# Altium PCB PCB.PcbDoc
Units mm, origin at the board's own origin, x right, y up, seen from the top; angles counter-clockwise.
Board outline 26.7 x 28 mm, 2 copper layers (Top Layer, Bottom Layer), stack 1.572 mm thick; 11 components, 7 nets, 46 pads, 59 vias.
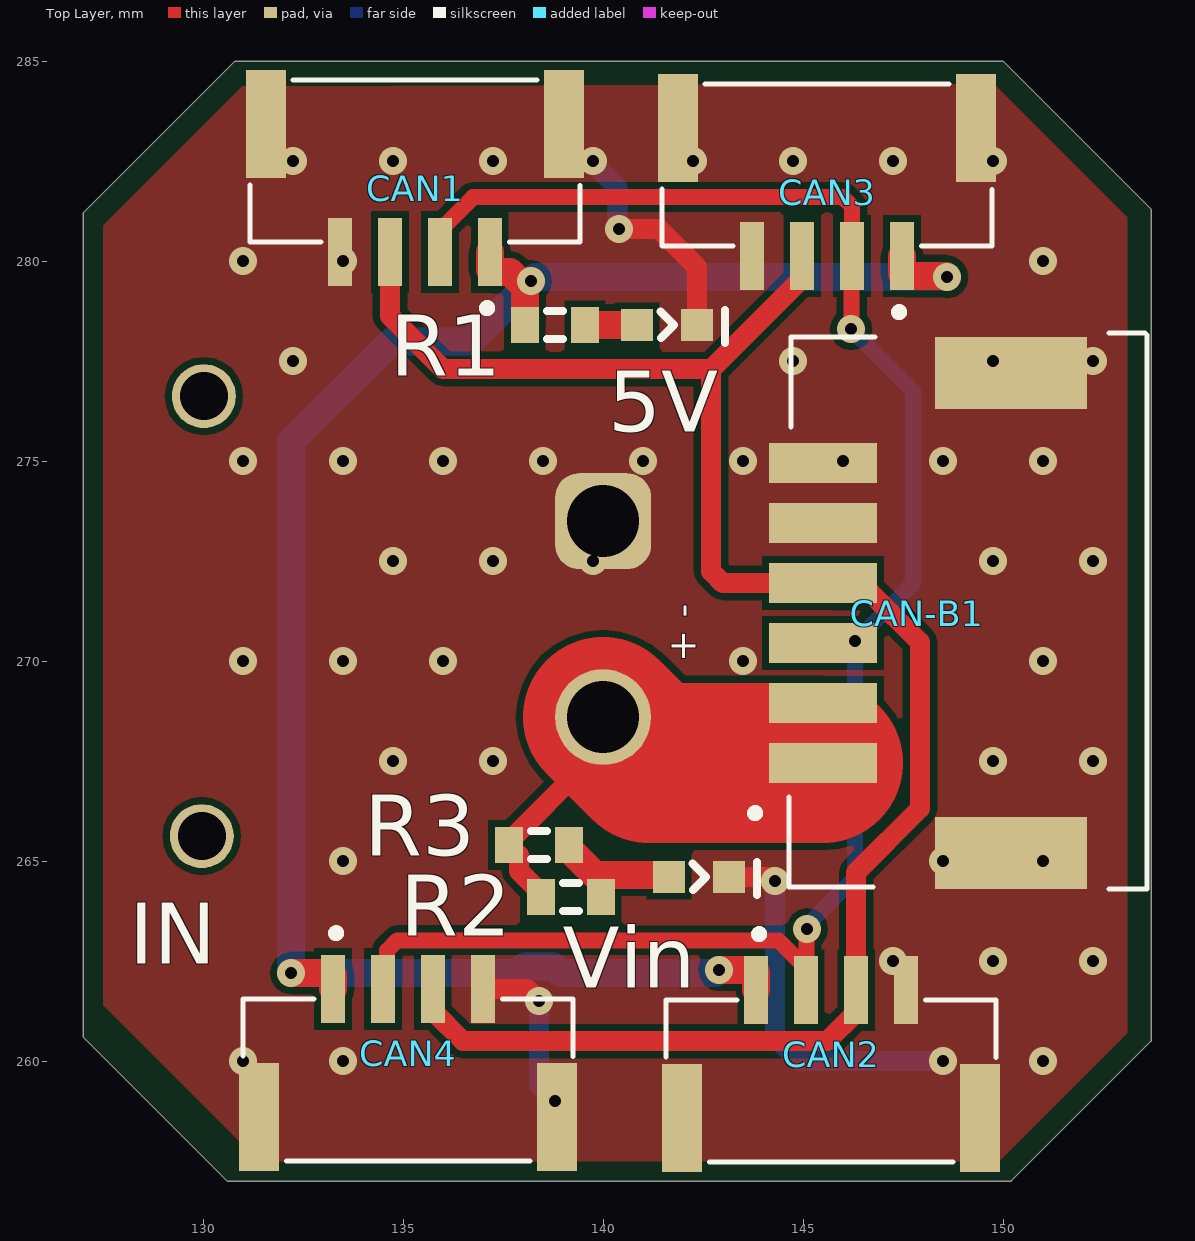
[diagram p0: Top Layer view]
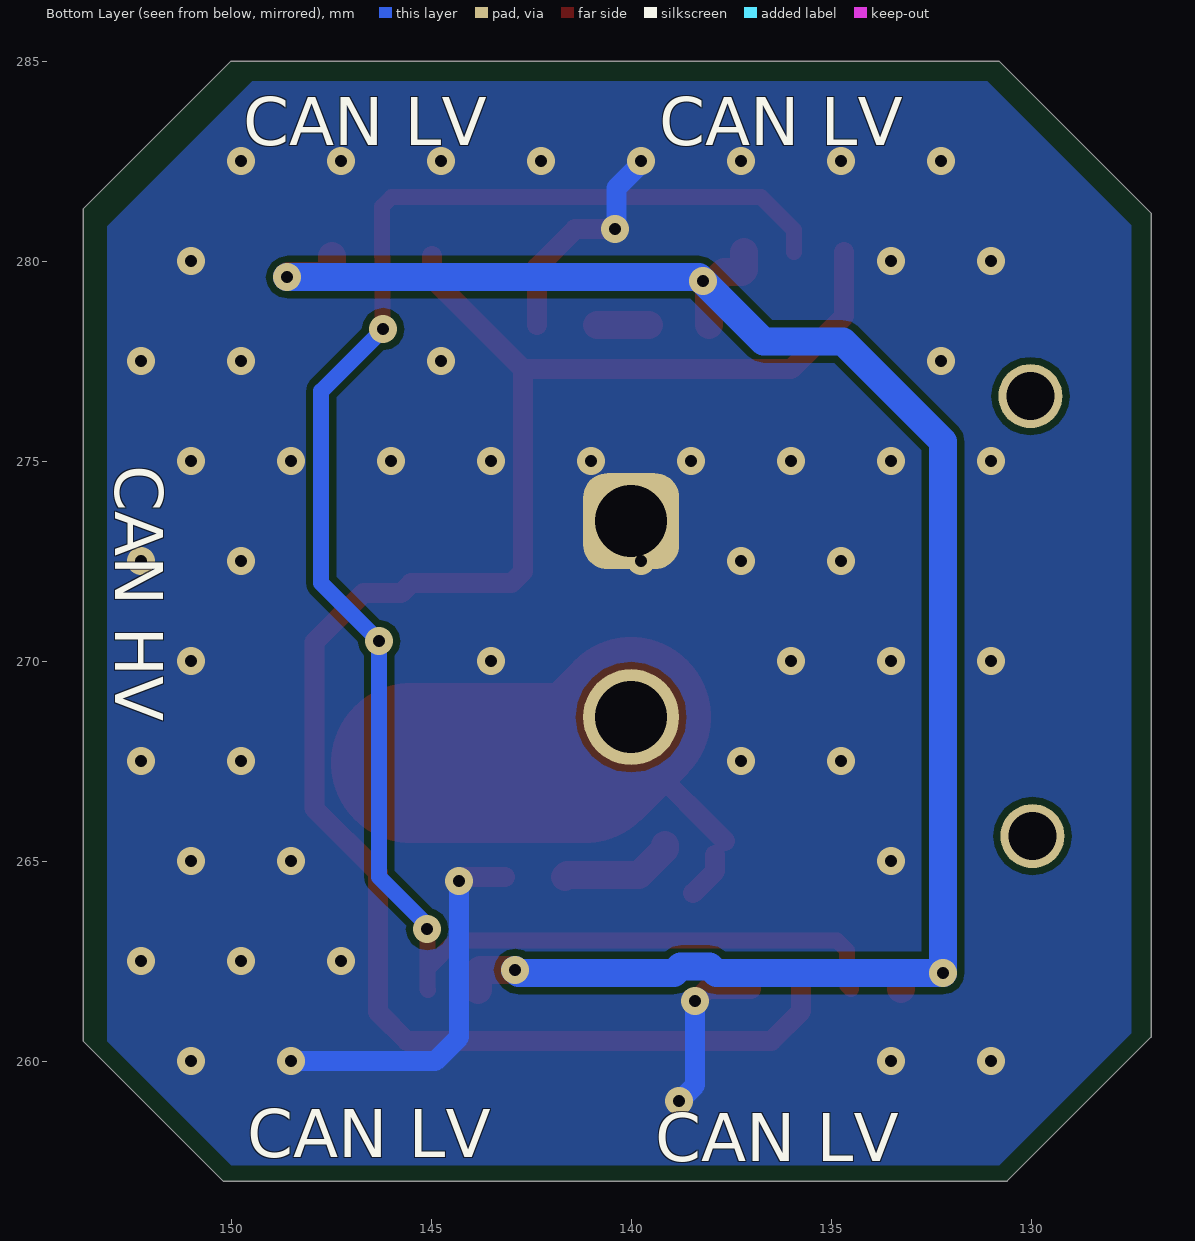
[diagram p1: Bottom Layer view, seen from below]
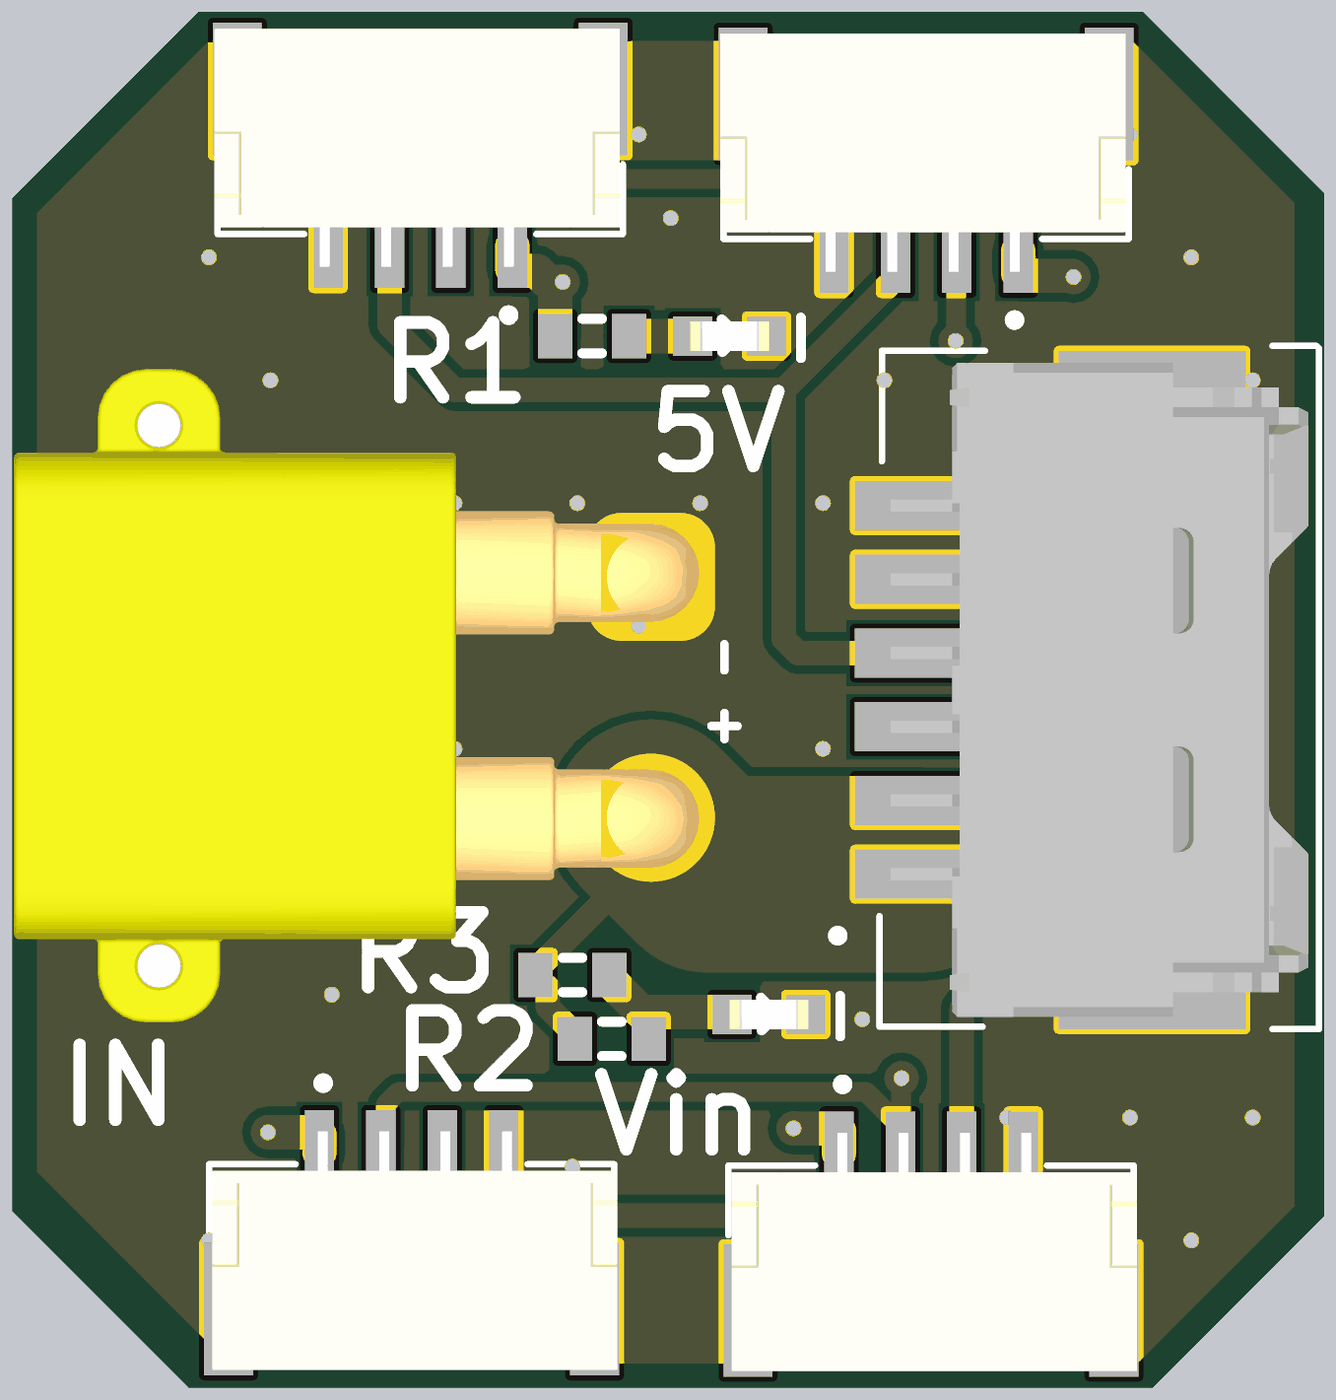
[diagram p2: 3D render of the assembled board from above, using the file's embedded part models]

## Layer stack, top to bottom
Top Solder: solder mask 0.01, Solder Resist, Dk 3.5
Top Layer: signal copper 0.036
Dielectric 1: dielectric 1.5, FR-4, Dk 4.8
Bottom Layer: signal copper 0.036
Bottom Solder: solder mask 0.01, Solder Resist, Dk 3.5

## Board outline
127,260.6 127,281.2 130.8,285 150,285 153.7,281.3 153.7,260.5 150.2,257 130.6,257

## Design rules (kind name [scope] priority, off if disabled: settings)
Clearance [All] p1: gap=0.17 ignorepadtopadclearanceinfootprint=FALSE except(-3: SMDPad-Via)
HoleSize [All] p1: absolutevalues=TRUE maxlimit=20 minlimit=0.025 maxpercent=80.000 minpercent=20.000
MinimumSolderMaskSliver [All] p1: minsoldermaskwidth=0.17
PolygonConnect PolygonConnect_1 [InNetClass('direct')] p1: connectstyle=Direct reliefconductorwidth=0.254 reliefentries=4 polygonreliefangle="90 Angle" airgapwidth=0.254
PolygonConnect [All] p2: connectstyle=Direct reliefconductorwidth=0.254 reliefentries=4 polygonreliefangle="90 Angle" airgapwidth=0.254
RoutingVias [All] p1: holewidth=0.3 width=0.7 viastyle="Through Hole" minholewidth=0.3 minwidth=0.7 maxholewidth=20 maxwidth=20
SilkToSilkClearance [All] p1: silktosilkclearance=0
SilkToSolderMaskClearance [IsPad] p1: minsilkscreentomaskgap=0 clearancetoexposedcopper=TRUE
SolderMaskExpansion [All] p1: expansion=0.102 istentingtop=FALSE
Width [All] p1: maxlimit=10 minlimit=0.17 preferedwidth=0.254 minimp=50.000000 maximp=50.000000 favimp=50.000000
26 further rules are at their usual default settings.

## Classes and differential pairs
component class "CAN MUX": 5V CAN1 CAN2 CAN3 CAN4 CAN-B1 IN R1 Vin

## Components (designator, comment, footprint, x,y, rotation, side; value= is the part's Value field where it differs from the comment)
5V "0603-LED-RED" *LEDM1608X80_LTE-C1906R-14(Primary) 141.6,278.4 r180 top value=RED
CAN1 "SM04B-GHS-TB(LF)(SN)-" JST_SM04B-GHS-TB(LF)(SN)- 135.3,282.5 r180 top
CAN2 "SM04B-GHS-TB(LF)(SN)-" JST_SM04B-GHS-TB(LF)(SN)- 145.7,259.5 r0 top
CAN3 "SM04B-GHS-TB(LF)(SN)-" JST_SM04B-GHS-TB(LF)(SN)- 145.6,282.4 r180 top
CAN4 "SM04B-GHS-TB(LF)(SN)-" JST_SM04B-GHS-TB(LF)(SN)- 135.125,259.525 r0 top
CAN-B1 "502585-0670" MOLEX_502585-0670 145.7,271.2 r90 top
IN "XT30PW-M" XT30PW-M 140,273.5 r270 top
R1 "RC0603FR-07330RL" J1-0603 138.8,278.4 r0 top value=330
R2 "RC0603FR-0724KL" J1-0603 139.2,264.1 r0 top value=24k
R3 "RC0603FR-0724KL" J1-0603 138.4,265.4 r0 top value=24k
Vin "0603-LED-ORANGE" *LEDM1608X80_LTE-C1906R-14(Primary) 142.4,264.6 r180 top value=ORANGE

## Footprints (in the part's own frame and the unit in brackets; to place one, negate y for a bottom-side part, rotate by r counter-clockwise, add the part's x,y. Pads: shape width x height; smd on the part's side, far side on the other; paste and mask are expansions set on the pad)
*LEDM1608X80_LTE-C1906R-14(Primary) [mm]
  rect 0.8x0.8 smd: A(0.75,0) C(-0.75,0)
  silkscreen extent -1.45,-0.38 0.16,0.45, body extent -0.8,-0.3 0.8,0.3, height 1.15
J1-0603 [mm] "Chip Resistor, Body 1.6x0.8mm, IPC High Density"
  rect 0.7x0.9 smd: 1(-0.75,0) 2(0.75,0)
  silkscreen extent -0.2,-0.35 0.2,0.35, body extent -0.85,-0.48 0.85,0.48, height 0.9
JST_SM04B-GHS-TB(LF)(SN)- [mm]
  rect 0.6x1.7 smd: 1(-1.875,2.275) 2(-0.625,2.275) 3(0.625,2.275) 4(1.875,2.275)
  rect 1x2.7 smd: SH1(-3.725,-0.925) SH2(3.725,-0.925)
  silkscreen extent -4.13,-2.02 4.13,3.77, body extent -4.06,-2.16 4.19,2.69, height 4.35
MOLEX_502585-0670 [mm]
  rect 1x2.7 smd: 1(-3.75,0.2) 2(-2.25,0.2) 3(-0.75,0.2) 4(0.75,0.2) 5(2.25,0.2) 6(3.75,0.2)
  rect 1.8x3.8 smd: P1(-6,-4.5) P2(6,-4.5)
  silkscreen extent -6.9,-7.9 7,2, body extent -6.65,-7.68 6.65,0.82, height 6.41
XT30PW-M [mm]
  round 1.6 hole 1.2: 1(-3.124,-9.982) 1(7.874,-10.033)
  rrect50% 2.4x2.4 hole 1.8: MINUS(0,0)
  round 2.4 hole 1.8: PLUS(4.9,0)
  body extent -4.23,-12.97 9.07,0.98, height 5

## Part data
5V: "Red 620nm LED Indication - Discrete 2.2V 0603 (1608 Metric)", Package="0603 Lite-On", MP=LTST-C194KRKT, SnapEDA_Link=https://www.snapeda.com/parts/LTE-C1906R-14/Lite-On%20Inc./view-part/?ref=snap, Type=SMD
CAN1 CAN2 CAN3 CAN4: "Connector Header Surface Mount, Right Angle 4 position 0.049 _1.25mm_", Package=None, ChipDip_Link=https://www.chipdip.ru/product/sm04b-ghs-tb-lf-sn-gh-1.25mm-header-side-ent, HelpURL=http://www.farnell.com/datasheets/2082975.pdf, MF="JST Sales", MP=SM04B-GHS-TB_LF__SN_-, Price=None, SnapEDA_Link=https://www.snapeda.com/parts/SM04B-GHS-TB%28LF%29%28SN%29-/JST%20Sales%20America%20Inc./view-part/2759740/?ref=snap, System=Connector, Type=SMD
CAN-B1: "1.50mm Pitch, CLIK-Mate PCB Receptacle, Single Row, Surface Mount, Right-Angle, Tin Plating, Positive Lock, 6 Circuits, Natural", Package=None, MF=Molex, MP=502585-0670, Price=None, SnapEDA_Link=https://www.snapeda.com/parts/502494-0670/Molex/view-part/?ref=snap, System=Connector, Type=SMD
IN: Package="Package Analog Devices", MF=AMASS, MP=XT30PW-M, Price=None, SnapEDA_Link=https://www.snapeda.com/parts/XT60-M/AMASS/view-part/?ref=snap, Type=SMT
R1: "330 Ohms ±1% 0.1W, 1/10W Chip Resistor 0603 (1608 Metric) Thick Film", Package=R0603, ChipDip_Link=https://www.chipdip.ru/product0/9000079628, HelpURL=https://www.yageo.com/upload/media/product/productsearch/datasheet/rchip/PYu-RC_Group_51_RoHS_L_10.pdf, MF="Yageo or NXP", MP=RC0603FR-07330RL, SnapEDA_Link=https://www.snapeda.com/parts/RC0603FR-07330RL/Yageo/view-part/?ref=search&t=RC0603FR-07330RL, Type=SMD
R2 R3: "24 kOhms ±1% 0.1W, 1/10W Chip Resistor 0603 (1608 Metric) Thick Film", Package=R0603, ChipDip_Link=https://www.chipdip.ru/product0/9000079736, HelpURL=https://www.yageo.com/upload/media/product/productsearch/datasheet/rchip/PYu-RC_Group_51_RoHS_L_10.pdf, MF="Yageo or NXP", MP=RC0603FR-0724KL, SnapEDA_Link=https://www.snapeda.com/parts/RC0603FR-074K7L/Yageo/view-part/?ref=dk&t=RC0603FR-074K7L&con_ref=None, Type=SMD
Vin: "Orange 605nm LED Indication - Discrete 2.2V 0603 (1608 Metric)", Package="0603 Lite-On", MP=LTST-C194KFKT, SnapEDA_Link=https://www.snapeda.com/parts/SML-D12D1WT86/Rohm/view-part/?ref=search&t=0603%20LED%20orange, Type=SMD

## Via types
v1: diameter 0.7, hole 0.3, Top Layer to Bottom Layer, tented both sides, 59 vias

## Nets (pads, with @x,y where several pads share a name; then routed paths per layer and width w, separated by ;. In a path a pad name is that pad's centre, name@x,y a point inside that pad or via, vN(x,y) a via of type N, cw(c..) or ccw(c..) an arc to the next point about the centre after c; other vN are vias at no path point)
5V: CAN1.1 CAN2.1 CAN3.1 CAN4.1 R1.1 | length 49.4
  Top Layer w0.7: v1(132.2,262.2) 133.2,262.2 133.25,262.15 CAN4.1 ; CAN1.1 137.175,279.775 137.225,279.725 137.675,279.725 137.9,279.5 v1(138.2,279.5) 138.05,279.35 R1.1 ; v1(142.9,262.28) 142.905,262.275 143.775,262.275 143.825,262.225 CAN2.1 ; CAN3.1 147.475,279.675 147.525,279.625 148.575,279.625 v1(148.6,279.6)
  Bottom Layer w0.7: v1(142.9,262.28) 142.82,262.2 138.93,262.2 138.76,262.37 138.04,262.37 137.87,262.2 v1(132.2,262.2) 132.2,275.49 134.705,277.995 136.695,277.995 v1(138.2,279.5) 138.3,279.6 v1(148.6,279.6)
CAN_H: CAN1.2 CAN2.2 CAN3.2 CAN4.2 CAN-B1.3 | length 44.5
  Top Layer w0.4: CAN4.2 134.6,261.9 134.6,262.766 134.854,263.02 144.38,263.02 CAN2.2@145.075,262.325 ; CAN1.2 135.925,280.775 136.75,281.6 145.991,281.6 146.225,281.366 CAN3.2 146.212,280.112 146.212,278.312 v1(146.2,278.3) ; CAN2.2 145.088,261.787 145.088,262.325 145.088,263.287 v1(145.1,263.3)
  Bottom Layer w0.4: v1(145.1,263.3) 145.1,263.4 146.3,264.6 v1(146.3,270.5) 147.75,271.95 147.75,276.75 v1(146.2,278.3)
CAN_L: CAN1.3 CAN2.3 CAN3.3 CAN4.3 CAN-B1.4 | length 46.6
  Top Layer w0.5: CAN1.3 134.675,278.625 136,277.3 142.7,277.3 ; CAN4.3 135.75,261.25 136.495,260.505 145.605,260.505 146.325,261.225 CAN2.3 146.325,264.719 147.92,266.314 147.92,270.474 146.694,271.7 145.75,271.7 CAN-B1.4 142.993,271.95 142.7,272.243 142.7,277.3 ; CAN3.3 144.975,279.575 142.7,277.3
GND: 5V.C CAN1.4 CAN1.SH1 CAN1.SH2 CAN2.4 CAN2.SH1 CAN2.SH2 CAN3.4 CAN3.SH1 CAN3.SH2 CAN4.4 CAN4.SH1 CAN4.SH2 CAN-B1.5 CAN-B1.6 CAN-B1.P1 CAN-B1.P2 IN.MINUS Vin.C | length 19.5
  Top Layer w0.5: CAN4.4 138.1,261.8 v1(138.4,261.5) ; v1(140.4,280.8) 141.4,280.8 142.35,279.85 5V.C ; Vin.C 144.2,264.6 v1(144.3,264.5)
  Bottom Layer w0.5: v1(138.4,261.5) 138.4,259.4 v1(138.8,259) ; v1(139.75,282.5) 139.75,282.446 140.362,281.834 140.362,280.838 v1(140.4,280.8) ; v1(144.3,264.5) 144.3,260.6 144.9,260 v1(148.5,260)
  other v1: 131,260 133.5,260 151,260 147.25,262.5 149.75,262.5 152.25,262.5 133.5,265 148.5,265 151,265 134.75,267.5 137.25,267.5 149.75,267.5 152.25,267.5 131,270 133.5,270 136,270 143.5,270 151,270 134.75,272.5 137.25,272.5 139.75,272.5 149.75,272.5 152.25,272.5 131,275 133.5,275 136,275 138.5,275 141,275 143.5,275 146,275 148.5,275 151,275 132.25,277.5 144.75,277.5 149.75,277.5 152.25,277.5 131,280 133.5,280 151,280 132.25,282.5 134.75,282.5 137.25,282.5 142.25,282.5 144.75,282.5 147.25,282.5 149.75,282.5
Net5V_A: 5V.A R1.2 | length 1.3
  Top Layer w0.7: R1.2 5V.A
NetR2_2: R2.2 R3.2 Vin.A | length 2.9
  Top Layer w0.7: R3.2 139.15,265.3 139.8,264.65 141.6,264.65 Vin.A
Vin: CAN-B1.1 CAN-B1.2 IN.PLUS R2.1 R3.1 | length 11.8
  Top Layer w0.2: R3.1@137.65,265.5 R3.1 R3.1@137.9,265.15 ; R2.1 R2.1@138.45,264.2 ; 139.579,267.429 139.579,268.179 IN.PLUS
  Top Layer w0.5: R3.1@137.65,265.5 139.579,267.429 ; R3.1@137.9,265.15 137.9,264.75 R2.1@138.45,264.2
  Top Layer w4: IN.PLUS 141.15,267.45 CAN-B1.1
pads on no net: IN.1

## Polygon pours and split planes (outlines as drawn)
GND on Top Layer "Top Layer-Vin" (solid, remove dead copper, pour order 64): 130.975,284.375 127.5,280.9 127.5,261.4 131.4,257.5 149.9,257.5 153.1,260.7 153.1,281.1 149.772,284.428
GND on Bottom Layer "Bottom Layer-GND" (solid, remove dead copper, pour order 62): 149.467,284.5 131.1,284.5 127.5,280.9 127.5,260.7 130.8,257.4 150,257.4 153.1,260.5 153.1,280.867

## Silkscreen, mask and mechanical layers (free items; w line width, h text height)
Bottom Overlay:
  text "CAN LV" at 139.3,282.9 h1.2
  text "CAN LV" at 149.7,282.9 h1.2
  text "CAN HV" at 152.9,274.9 h1.2 r90
  text "POWER CONNECTOR V'.Version'" at 149.6,273.2 h4
  text "CAN LV" at 149.6,257.6 h1.2
  text "CAN LV" at 139.4,257.5 h1.2
Mechanical 2:
  lines w0.2: 127,260.6 127,267.1 127,278.1 127,281.2 130.8,285 150,285 153.7,281.3 153.7,260.5 150.2,257 130.6,257 127,260.6

## Dimensions
130.8,285 to 130.6,257 on Mechanical 1
127,281.2 to 153.7,260.5 on Mechanical 1

## Text inside footprints (layer, text, board x,y; h text height)
IN: Top Overlay "+ -" at 142.311,269.969 h0.7 r90